# EAGLE board lock-board1_v1 (EAGLE 8.2.2)
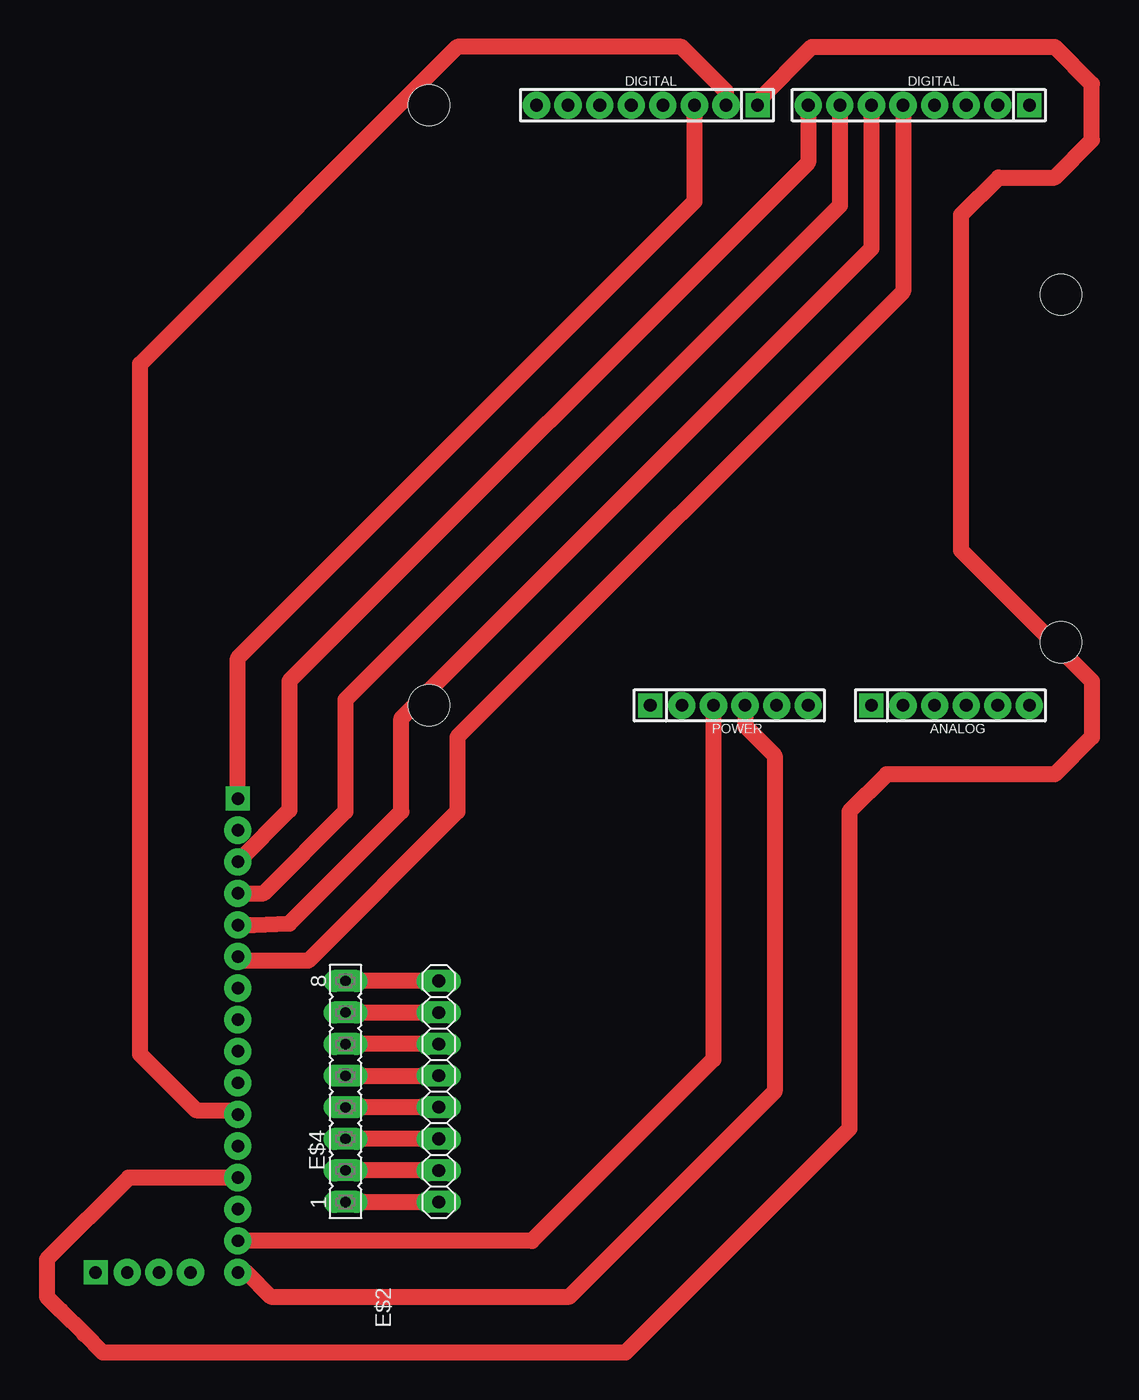
[diagram p0: board, top side]
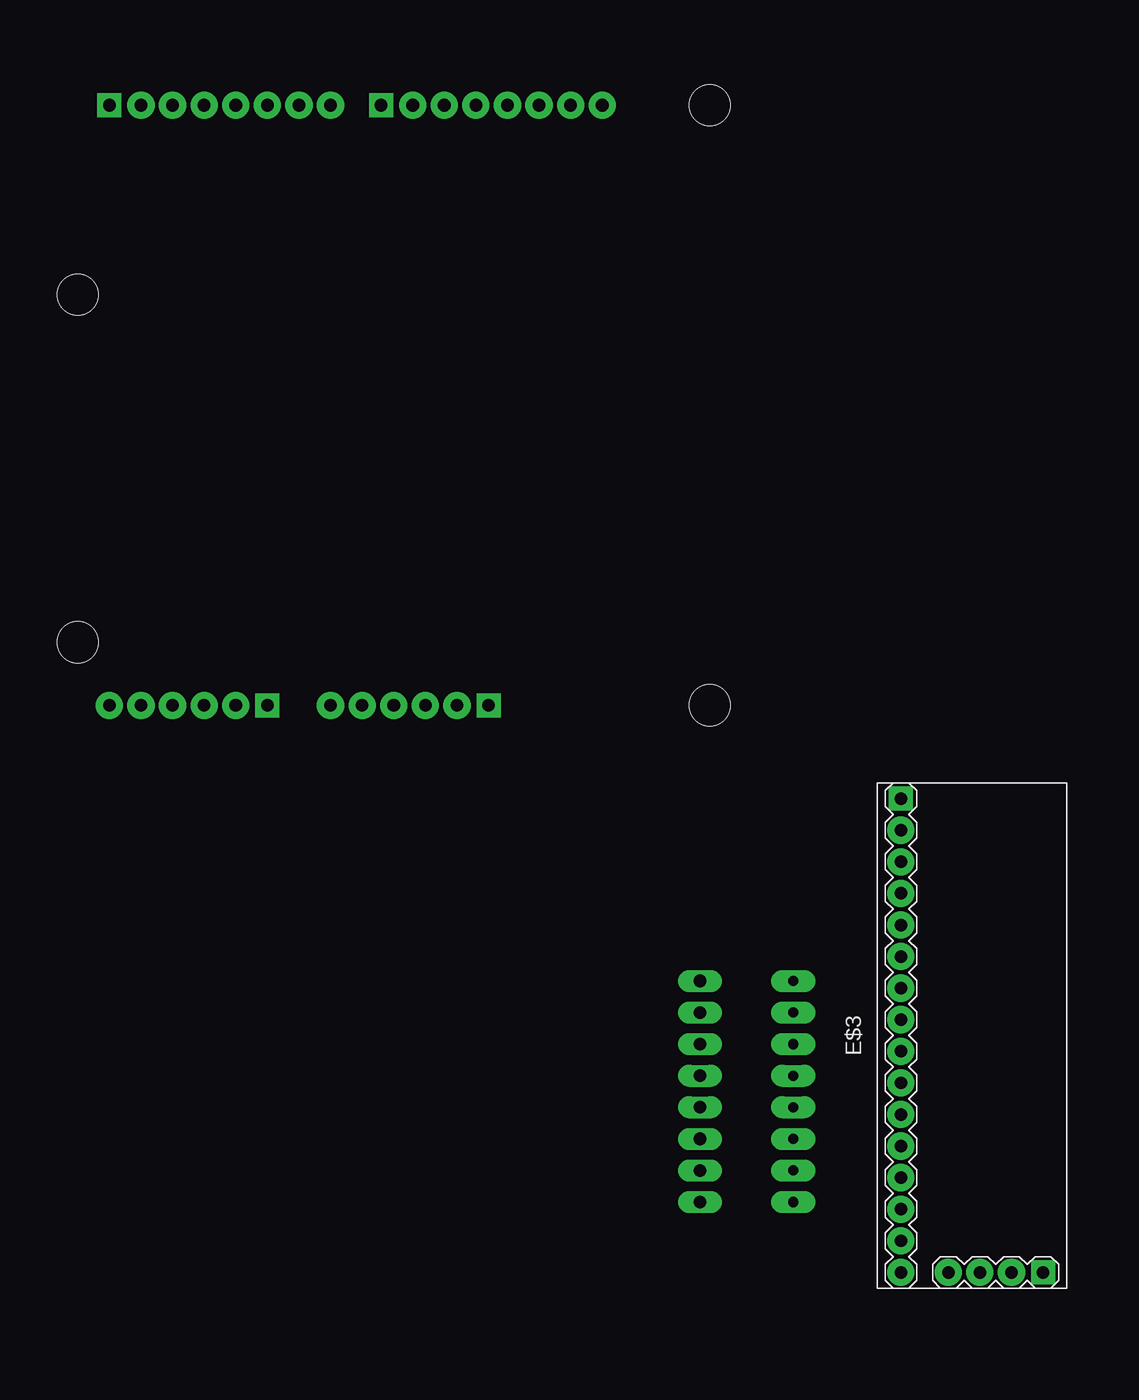
[diagram p1: board, bottom side, seen from below]

No outline drawn. Coordinates in mm, seen from the top.
Copper layers (1*16): Top 0.035mm / dielectric 1.5mm / Bottom 0.035mm
Design rules "default": minimum track width 6mil, minimum drill 0.35mm, track to track 6mil, track to pad 6mil, pad to pad 6mil, via to via 6mil, smd to smd 6mil, copper to edge 40mil, drill to drill 6mil, minimum pad ring 10mil, minimum via ring 8mil, stop-mask expansion 4mil, vias tented up to drill 0mil, thermal gap 10mil

## Footprints (pad centres in the part's own frame; a part is rotated, then mirrored left to right if it is on the bottom)
ARDUINO_SH_LCD-PLATFORM = drill 1.016 pad 2.184: 3V3 46.99,2.54; 5V 49.53,2.54; A1 64.77,2.54; A2 67.31,2.54; A3 69.85,2.54; A4 72.39,2.54; A5 74.93,2.54; AREF 35.306,50.8; D1 72.39,50.8; D2 69.85,50.8; D3 67.31,50.8; D4 64.77,50.8; D5 62.23,50.8; D6 59.69,50.8; D7 57.15,50.8; D9 50.546,50.8; D10 48.006,50.8; D11 45.466,50.8; D12 42.926,50.8; D13 40.386,50.8; GND 52.07,2.54; GND@1 54.61,2.54; GND@2 37.846,50.8; VIN 57.15,2.54 | drill 1.016 pad 1.93 square: A0 62.23,2.54; D0 74.93,50.8; D8 53.086,50.8; RST 44.45,2.54 | hole 3.3: 77.47,35.56; 77.47,7.62; 26.67,50.8; 26.67,2.54
RFID-RC522 = drill 1.016 pad 1.778 long: 3V3 -8.89,0; GND -3.81,0; IRQ -1.27,0; MISO 1.27,0; MOSI 3.81,0; RST -6.35,0; SCK 6.35,0; SS 8.89,0
LCD-I2C-CONVERTER = drill 1 pad 1.93 square: J1.1 -19.05,-5.08; J2.1 19.05,6.35 | drill 1 pad 2.184: J1.2 -19.05,-2.54; J1.3 -19.05,0; J1.4 -19.05,2.54; J2.2 16.51,6.35; J2.3 13.97,6.35; J2.4 11.43,6.35; J2.5 8.89,6.35; J2.6 6.35,6.35; J2.7 3.81,6.35; J2.8 1.27,6.35; J2.9 -1.27,6.35; J2.10 -3.81,6.35; J2.11 -6.35,6.35; J2.12 -8.89,6.35; J2.13 -11.43,6.35; J2.14 -13.97,6.35; J2.15 -16.51,6.35; J2.16 -19.05,6.35
FE08 = drill 0.813 pad 1.778 long: 1 -8.89,0; 2 -6.35,0; 3 -3.81,0; 4 -1.27,0; 5 1.27,0; 6 3.81,0; 7 6.35,0; 8 8.89,0

## Placement (x,y rotation side)
E$1  [ARDUINO_SH_LCD-PLATFORM]  2.55,43.51 0 top
E$2  [RFID-RC522]  30,15 90 top
E$3  [LCD-I2C-CONVERTER]  7.5,19.5 90 bottom
E$4  [FE08]  22.5,15 90 top

## Library data of the parts
E$1 = SHIELD-LCD16x2_Rev_B
E$2 = mfrc522-module
E$3 = converter_lcd_serial_i2c
E$4 = con-lsta

## Nets
S$1: E$1.D10 E$3.J2.1
S$2: E$1.D9 E$3.J2.11
S$3: E$1.D8 E$3.J2.13
S$4: E$1.D7 E$3.J2.3
S$5: E$1.D6 E$3.J2.4
S$6: E$1.D5 E$3.J2.5
S$7: E$1.D4 E$3.J2.6
S$8: E$1.GND E$3.J2.16
S$9: E$1.5V E$3.J2.15
S$10: E$2.SS E$4.8
S$11: E$2.SCK E$4.7
S$12: E$2.MOSI E$4.6
S$13: E$2.MISO E$4.5
S$14: E$2.IRQ E$4.4
S$15: E$2.3V3 E$4.1
S$16: E$2.RST E$4.2
S$17: E$2.GND E$4.3

## Tracks (layer width: path | path; a pad name or v marks a point on that pad's centre or on a via)
S$1
  Top 1.27: E$3.J2.1 13.85,49.85 50.56,86.56 E$1.D10
S$2
  Top 1.27: E$1.D9 53.1,95.4 49.5,99 31.5,99 6,73.5 6,18 10.5,13.5 13.5,13.5 E$3.J2.11
S$3
  Top 1.27: E$3.J2.13 5.07,8.07 -1.5,1.5 -1.5,-1.5 -0.38,-2.62 1.5,-4.5 3,-6 45,-6 63,12 63,37.5 66,40.5 79.5,40.5 82.5,43.5 82.5,48 72,58.5 72,85.5 75,88.5 79.5,88.5 82.5,91.5 82.5,96 79.5,99 60,99 55.64,94.64 E$1.D8
S$4
  Top 1.27: E$1.D7 59.7,89.7 18,48 18,37.62 E$3.J2.3
S$5
  Top 1.27: E$3.J2.4 15.93,30.93 22.5,37.5 22.5,46.5 62.24,86.24 E$1.D6
S$6
  Top 1.27: E$3.J2.5 15.11,28.39 18,28.5 27,37.5 27,45 64.78,82.78 E$1.D5
S$7
  Top 1.27: E$1.D4 67.32,79.32 31.5,43.5 31.5,37.5 19.5,25.5 14.2,25.5 E$3.J2.6
S$8
  Top 1.27: 14.55,0.45 E$3.J2.16 14.55,0.45 | 54.62,45.88 E$1.GND 54.62,44.38 57,42 57,15 40.5,-1.5 16.5,-1.5 14.55,0.45
S$9
  Top 1.27: E$3.J2.15 37.49,2.99 52.08,17.58 E$1.5V
S$10
  Top 1.27: E$2.SS E$4.8
S$11
  Top 1.27: E$4.7 E$2.SCK
S$12
  Top 1.27: E$2.MOSI E$4.6
S$13
  Top 1.27: E$4.5 E$2.MISO
S$14
  Top 1.27: E$2.IRQ E$4.4
S$15
  Top 1.27: 29.89,6.11 E$2.3V3 E$4.1
S$16
  Top 1.27: E$2.RST E$4.2
S$17
  Top 1.27: E$2.GND E$4.3